# Altium PCB PCB1.PcbDoc (part 35 of 35)
Units mm, origin at the board's own origin, x right, y up, seen from the top; angles counter-clockwise.
Board outline 94 x 82 mm, 2 copper layers (Top Layer, Bottom Layer); 46 components, 50 nets, 192 pads, 615 vias.
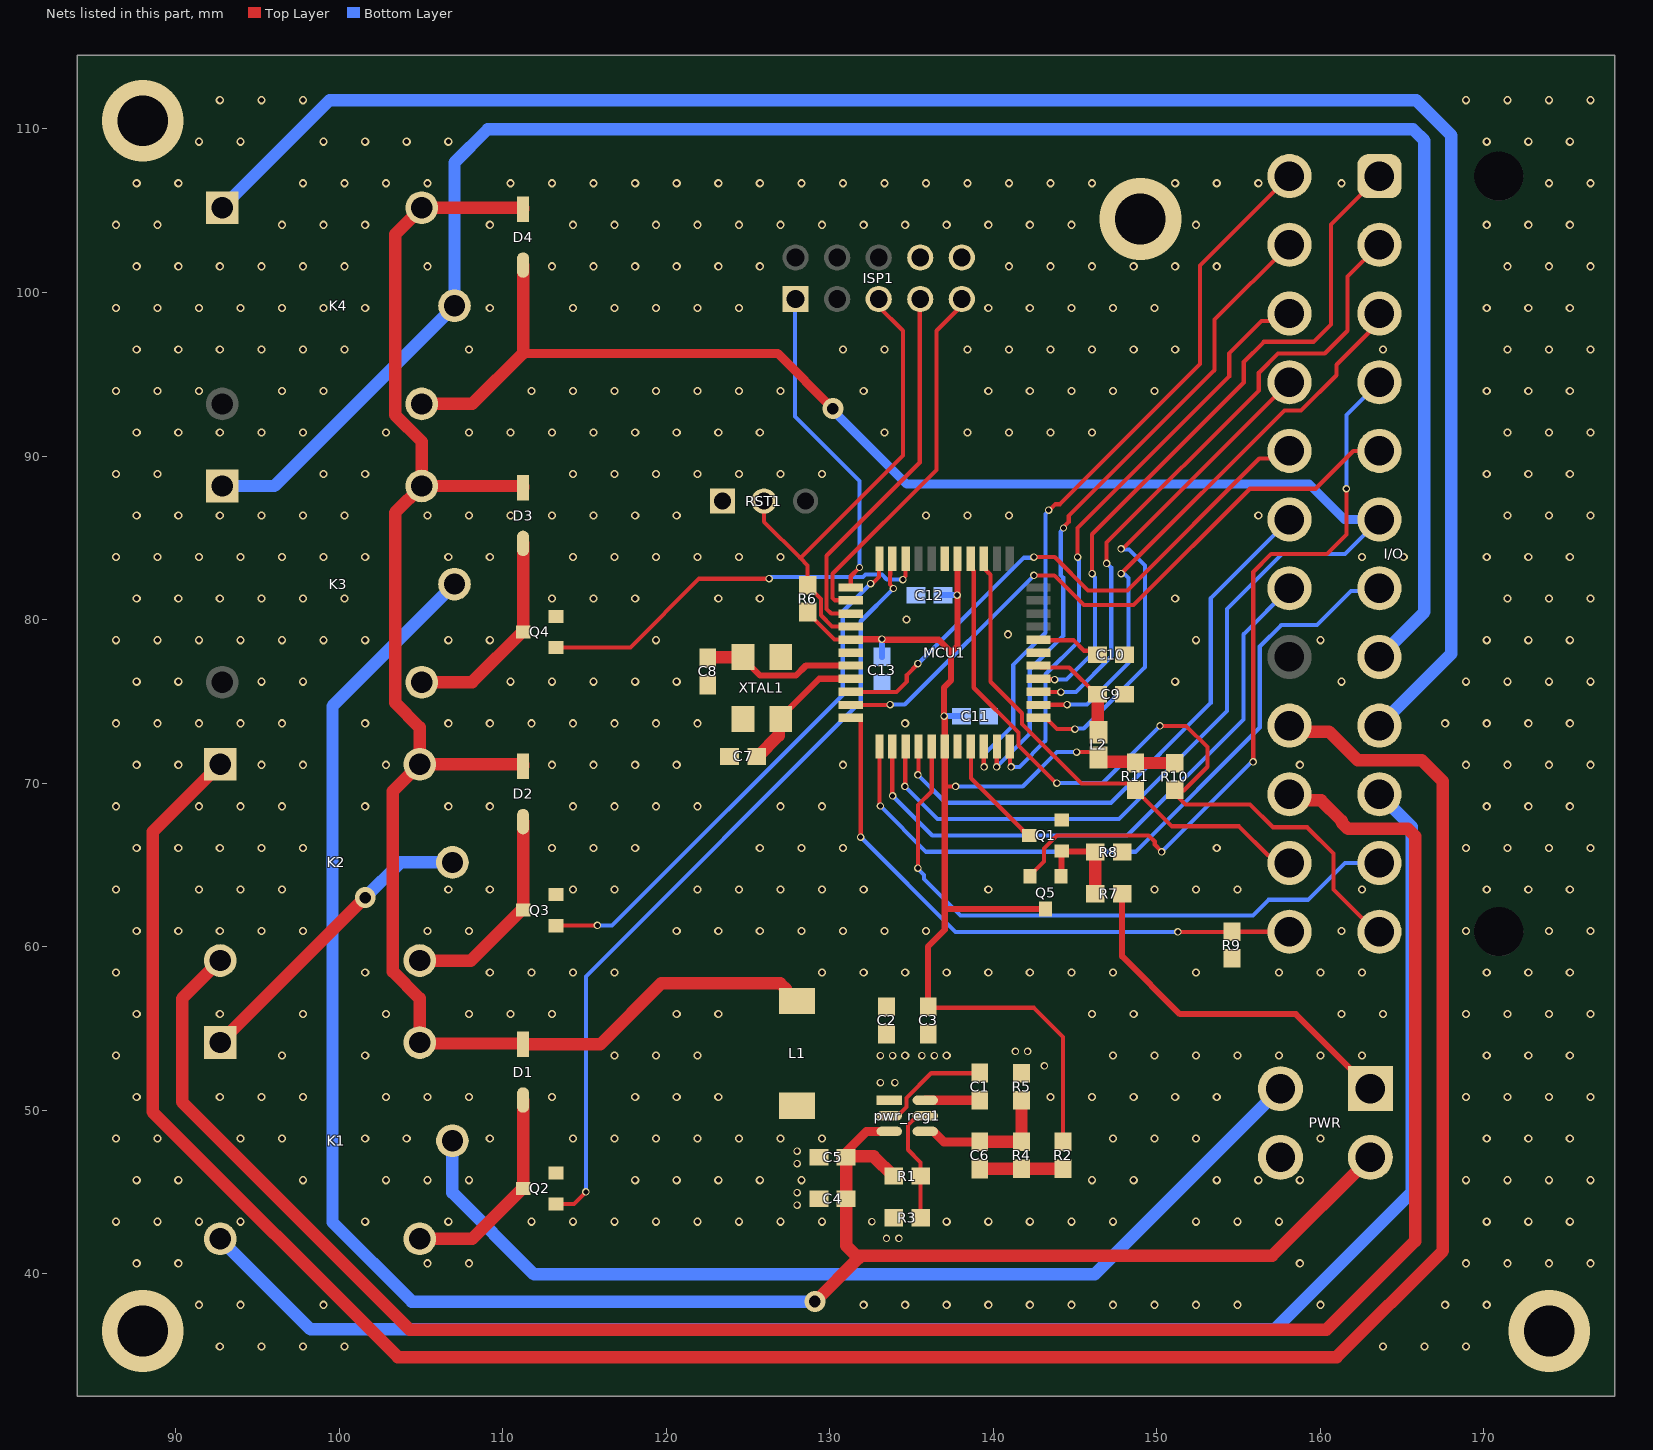
[diagram p35: the nets of this part, all layers, seen from the top]

## Part data
C1: library part CMP-13271-000587-1, "Cap Ceramic 0.1uF 25V SMD 0603", Case/Package=0603, Dielectric=X7R, Max Operating Temperature=125°C, Min Operating Temperature=-55°C, Package Quantity=10000, Tolerance=10%, Voltage=50V, Capacitance=0.1uF, Depth=0.8mm, Height=0.8mm, Lead Free="Lead Free", Length=1.6mm, Material=Ceramic, Mount="Surface Mount", Packaging="Tape and Reel", Radiation Hardening=No, Thickness=0.035inch, Voltage Rating=50V, Voltage Rating (DC)=50V, Width=0.031inch
C2 C3: library part CMP-13271-000587-1, "Cap Ceramic 22uF 25V X7R LOW ESR SMD 0603", Case/Package=0603, Dielectric=X7R, Max Operating Temperature=125°C, Min Operating Temperature=-55°C, Package Quantity=10000, Tolerance=10%, Voltage=50V, Capacitance=22uF, Depth=0.8mm, Height=0.8mm, Lead Free="Lead Free", Length=1.6mm, Material=Ceramic, Mount="Surface Mount", Packaging="Tape and Reel", Radiation Hardening=No, Thickness=0.035inch, Voltage Rating=50V, Voltage Rating (DC)=50V, Width=0.031inch
C4: library part CMP-13271-000587-1, "Cap Ceramic 10uF 25V SMD 0603", Case/Package=0603, Dielectric=X7R, Max Operating Temperature=125°C, Min Operating Temperature=-55°C, Package Quantity=10000, Tolerance=10%, Voltage=50V, Capacitance=10uF, Depth=0.8mm, Height=0.8mm, Lead Free="Lead Free", Length=1.6mm, Material=Ceramic, Mount="Surface Mount", Packaging="Tape and Reel", Radiation Hardening=No, Thickness=0.035inch, Voltage Rating=50V, Voltage Rating (DC)=50V, Width=0.031inch
C5: library part CMP-13271-000587-1, "Cap Ceramic 1uF 25V SMD 0603", Case/Package=0603, Dielectric=X7R, Max Operating Temperature=125°C, Min Operating Temperature=-55°C, Package Quantity=10000, Tolerance=10%, Voltage=50V, Capacitance=1uF, Depth=0.8mm, Height=0.8mm, Lead Free="Lead Free", Length=1.6mm, Material=Ceramic, Mount="Surface Mount", Packaging="Tape and Reel", Radiation Hardening=No, Thickness=0.035inch, Voltage Rating=50V, Voltage Rating (DC)=50V, Width=0.031inch
C6: library part CMP-13271-000587-1, "Cap Ceramic 75pF 25V SMD 0603", Case/Package=0603, Dielectric=X7R, Max Operating Temperature=125°C, Min Operating Temperature=-55°C, Package Quantity=10000, Tolerance=10%, Voltage=50V, Capacitance=75pF, Depth=0.8mm, Height=0.8mm, Lead Free="Lead Free", Length=1.6mm, Material=Ceramic, Mount="Surface Mount", Packaging="Tape and Reel", Radiation Hardening=No, Thickness=0.035inch, Voltage Rating=50V, Voltage Rating (DC)=50V, Width=0.031inch
C7 C8: library part CMP-13271-000587-1, "Cap Ceramic 22pF 25V SMD 0603", Case/Package=0603, Dielectric=X7R, Max Operating Temperature=125°C, Min Operating Temperature=-55°C, Package Quantity=10000, Tolerance=10%, Voltage=50V, Capacitance=22pF, Depth=0.8mm, Height=0.8mm, Lead Free="Lead Free", Length=1.6mm, Material=Ceramic, Mount="Surface Mount", Packaging="Tape and Reel", Radiation Hardening=No, Thickness=0.035inch, Voltage Rating=50V, Voltage Rating (DC)=50V, Width=0.031inch
C9 C10 C11 C12 C13: library part CMP-13271-000587-1, "Cap Ceramic 100nF 50V X7R ±10% Pad SMD 0603 +125°C T/R", Case/Package=0603, Dielectric=X7R, Max Operating Temperature=125°C, Min Operating Temperature=-55°C, Package Quantity=10000, Tolerance=10%, Voltage=50V, Capacitance=100nF, Depth=0.8mm, Height=0.8mm, Lead Free="Lead Free", Length=1.6mm, Material=Ceramic, Mount="Surface Mount", Packaging="Tape and Reel", Radiation Hardening=No, Thickness=0.035inch, Voltage Rating=50V, Voltage Rating (DC)=50V, Width=0.031inch
D1 D2 D3 D4: library part CMP-0303-00003-3, "DIODE SCHOTTKY 40V 1A SOD123", Average Rectified Current=1A, Capacitance=110pF, Case/Package=SOD-123-2, Forward Voltage=450mV, Max Forward Surge Current (Ifsm)=25A, Max Operating Temperature=125°C, Max Power Dissipation=450mW, Max Repetitive Reverse Voltage (Vrrm)=40V, Min Operating Temperature=-65°C, Package Quantity=3000, Peak Reverse Current=50uA, Contact Plating=Tin, Current Rating=1A, Element Configuration=Single, Forward Current=1A, Height=1.25mm, Lead Free="Lead Free", Length=2.85mm, Max Reverse Voltage (DC)=40V, Number of Pins=2, Output Current=1A, Packaging="Tape and Reel", Peak Non-Repetitive Surge Current=25A, Polarity=Standard, Radiation Hardening=No, REACH SVHC="No SVHC", Termination=SMD/SMT, Voltage Rating (DC)=40V, Weight=0.000353oz, Width=1.7mm
I/O: library part CMP-1502-00539-2, Color=White, Contact Resistance=10mΩ, Current Rating=6A, Insulation Resistance=1GΩ, Max Operating Temperature=105°C, Min Operating Temperature=-40°C, Operating Supply Voltage=600V, Connector Type="Male Pin, Socket", Contact Material=Copper, Contact Plating=Tin, Fastening Type=Ramp, Gender=Male, Height=12.8mm, Lead Pitch=4.2mm, Length=51.6mm, Mount="Through Hole", NexarPartId=23024662, Number of Contacts=24, Number of Pins=24, Number of Positions=24, Number of Rows=2, Pitch=4.2mm, REACH SVHC=Unknown, RoHS=Compliant, Row Spacing=4.191mm, Termination=Solder, Width=51.7mm
ISP1: library part CMP-2000-05031-1, "Male Header, Pitch 2.54 mm, 2 x 5 Position, Height 9.3 mm, Tail Length 2.79 mm, -55 to 105 degC, RoHS, Bulk", Current Rating=1A, Manufacturer=3M, Brand=3MElectronicSolutionsDivision, Contact Gender=Pin(Male), Contact Material=Brass, Contact Plating=Gold, Datasheet URL=http://datasheet.octopart.com/30310-6002HB-3M-datasheet-11537585.pdf, Datasheet Version=Apr-12, Factory Pack Quantity=1000, Housing Material=Polyester, Manufacturer URL=http://www.3m.com/, Mating Post Length=5.99mm, Mounting Angle=Straight, Mounting Style=StraightPin, Number of Positions=10Position, Number of Rows=2Row, Packaging=Tray, Pitch=2.54mm, Product=Headers, Product Category=Headers&WireHousings, RoHS=Details, Row Spacing=2.54mm, Series=303, Termination Post Length=2.79mm, Termination Style=ThroughHole, Type=Shrouded
K1 K2 K3 K4: library part CMP-03395-000112-1, "Relpol / RM51-3011-85-1005 / RELAY 10A 5V", Ambient Temperature Range High=+70°C, Ambient Temperature Range Low=-30°C, Coil Power=360mW, Coil Resistance=70Ω, Coil Voltage=5V, Current Rating=10A, Manufacturer=TE, Manufacturer Part Number=1-1721150-0, Automotive=No, Category=Relay, Coil Type=Non-Latching, ComponentLink2Description=Datasheet, ComponentLink2URL=https://www.te.com/usa-en/product-1-1721150-0.html?te_bu=Cor&te_type=other&te_campaign=oct_glo_cor-oct-global-oth-prtnr-fy19-oct-octo-buy-bom_sma-298_2&elqCampaignId=35216, Device Class L1=Electromechanical, Device Class L2=Relays, Device Class L3="Power Relays", Digikey Description="RELAY GEN PURPOSE SPDT 10A 5V", Height=16.3mm, Lead Free=Yes, Number of Contacts=1, Octopart=https://octopart.com/1-1721150-0-te+connectivity-41294869, Package=1-1721150-0, RoHS=TRUE, Standoff Height=0.2mm, Switching Current=10A, Throw Configuration=SPDT
L1: library part CMP-0227-00155-2, "15uF, 2.7A  HPI0630-150", Ambient Temperature Range High=85°C, Ambient Temperature Range Low=-40°C, Current Rating=2.7A, DC Resistance (DCR)=110mΩ, Inductance=15µH, Max Operating Temperature=125°C, Self Resonant Frequency=9.5MHz, Tolerance=20%, Depth=7.3mm, Height=4.5mm, Length=7.3mm, Max DC Current=2.7A, Min Operating Temperature=-40°C, NexarPartId=31136509, Number of Pins=2, Packaging="Tape & Reel", RoHS=Compliant, Shielding=Shielded, Width=7.3mm
L2: library part CMP-14484-000247-1, "SMD Inductors 10uH ±10% 0.38A 0.468Ω 0603", Case Code (Imperial)=0603, Case Code (Metric)=1608, Current Rating=380mA, DC Resistance (DCR)=468mR, Inductance Tolerance=10%, Max Operating Temperature=105°C, Min Operating Temperature=-40°C, Package Quantity=3000, Resistor Type=Wirewound, Saturation Current=115mA, Self Resonant Frequency=32MHz, Test Frequency=2.52MHz, Case/Package=0603, Core Material=Ferrite, DC Current=380mA, Depth=1mm, Halogen Free="Halogen Free", Height=0.8mm, Height - Seated (Max)=0.039inch, Inductance=10uH, Lead Free="Lead Free", Length=0.063inch, Max DC Current=380mA, Military Standard=Not, Mount="Surface Mount", Packaging="Tape and Reel", Radiation Hardening=No, RoHS Compliant=Yes, Series=CB, Shielding=Unshielded, Termination=SMD/SMT, Tolerance=10%, Width=0.031inch
MCU1: "AVR AVRÂ® ATmega Microcontroller IC 8-Bit 16MHz 32KB (16K x 16) FLASH 44-TQFP (10x10)", Package="TQFP-44 Microchip", Check_prices=https://www.snapeda.com/parts/ATMEGA32A-AU/Microchip/view-part/?ref=eda, MF=Microchip, MP=ATMEGA32A-AU, SnapEDA_Link=https://www.snapeda.com/parts/ATMEGA32A-AU/Microchip/view-part/?ref=snap
PWR: library part CMP-03369-000114-1, "CONN HEADER R/A 4POS 4.2MM", Contact Current Rating=9A, Flammability Rating="UL94 V-0", Housing Color=Natural, Max Operating Temperature=221°C, Max Voltage Rating (AC)=600V, Min Operating Temperature=-40°C, Number of Power Positions=4, Package Quantity=400, Approvals=CSA, Circuit Application=Power, Connector System=Wire-to-Board, Connector Type=Pin, Contact Material=Brass, Contact Plating=Tin, Contact Retention="No (Without)", Contact Type="Male Pin", Current Rating=9A, ELV=Compliant, Fastening Type=Ramp, Height=0.386inch, Housing Material=Nylon, Insulation Diameter=0.122inch, Lead Free="Lead Free", Length=9.6mm, Mating Alignment="Yes (With)", Mating Retention="Yes (With)", Mount="Through Hole", Number of Circuits=4, Number of Contacts=4, Number of Ports=1, Number of Positions=4, Number of Rows=2, Number of Terminals/Pins=4, Orientation="Right Angle", Packaging=Tray, PCB Mount Alignment="No (Without)", PCB Mount Retention=Without, PCB Mounting Orientation="Right Angle", PCB Thickness=0.063mm, Pitch=4.2mm, Plating Thickness=78.73um, Radiation Hardening=No, RoHS Compliant=Yes, Row Spacing=4.2inch, Sealable="No (Without)", Selectively Loaded="No (Without)", Series=VAL-U-LOK, Termination=Solder, VDE Tested=No, Voltage Rating=600V, Width=13mm
pwr_reg1: library part CMP-04918-000439-1, "IC REG BUCK ADJ 2A TSOT23-6", Case/Package=SOT-23-6, Max Input Voltage=28V, Max Operating Temperature=125°C, Min Input Voltage=4.5V, Min Operating Temperature=-40°C, Min Output Voltage=596mV, Output Current=2A, Quiescent Current=40uA, Switching Frequency=500kHz, Lead Free="Lead Free", Max Output Voltage=28V, Mount="Surface Mount", Number of Outputs=1, Output Configuration=Positive, Output Type=Adjustable, Packaging="Tape and Reel", RoHS Compliant=Yes, Synchronous Rectifier=Yes
Q1 Q2 Q3 Q4 Q5: library part CMP-2000-04929-2, "MOSFET N-CH 60V 115MA SOT23-3", Case/Package=SOT-23, Continuous Drain Current (ID)=115mA, Drain to Source Breakdown Voltage=70V, Drain to Source Resistance=7.5R, Drain to Source Voltage (Vdss)=60V, Gate to Source Voltage (Vgs)=20V, Input Capacitance=50pF, Max Operating Temperature=150°C, Max Power Dissipation=300mW, Min Operating Temperature=-55°C, Package Quantity=3000, Power Dissipation=540mW, Threshold Voltage=2.5V, Contact Plating=Tin, Current Rating=115mA, Dual Supply Voltage=60V, Element Configuration=Single, Fall Time=5.6ns, Height=1mm, Lead Free="Lead Free", Length=2.9mm, Mount="Surface Mount", Nominal Vgs=2.5V, Number of Channels=1, Number of Elements=1, Number of Pins=3, On-State Resistance=7.5R, Packaging="Tape and Reel", Radiation Hardening=No, Rds On Max=7.5R, REACH SVHC="No SVHC", Rise Time=3ns, Termination=SMD/SMT, Turn-Off Delay Time=11ns, Turn-On Delay Time=7ns, Voltage=60V, Voltage Rating (DC)=60V, Weight=0.000282oz, Width=1.3mm
R1: library part CMP-2000-03245-2, "511kΩ, 0.1W, 0603", Case Code (Imperial)=0603, Case Code (Metric)=1608, Max Operating Temperature=155°C, Max Power Dissipation=100mW, Min Operating Temperature=-55°C, Package Quantity=10, Temperature Coefficient=100ppm/°C, Tolerance=1%, Voltage Rating=75V, Case/Package=0603, Composition="Thick Film", Contact Plating=Tin, Depth=0.85mm, Features="Automotive AEC-Q200", Height=0.45mm, Lead Free="Lead Free", Length=1.55mm, Military Standard=Not, Mount="Surface Mount", Number of Terminations=2, Packaging="Tape and Reel", Power Rating=100mW, Radiation Hardening=No, Resistance=511k, Termination=SMD/SMT, Voltage Rating (DC)=75V, Weight=7.1E-05oz, Width=0.033inch
R2: library part CMP-2000-03245-2, "49.9Ω, 0.1W, 0603", Case Code (Imperial)=0603, Case Code (Metric)=1608, Max Operating Temperature=155°C, Max Power Dissipation=100mW, Min Operating Temperature=-55°C, Package Quantity=10, Resistance=49.9, Temperature Coefficient=100ppm/°C, Tolerance=1%, Voltage Rating=75V, Case/Package=0603, Composition="Thick Film", Contact Plating=Tin, Depth=0.85mm, Features="Automotive AEC-Q200", Height=0.45mm, Lead Free="Lead Free", Length=1.55mm, Military Standard=Not, Mount="Surface Mount", Number of Terminations=2, Packaging="Tape and Reel", Power Rating=100mW, Radiation Hardening=No, Termination=SMD/SMT, Voltage Rating (DC)=75V, Weight=7.1E-05oz, Width=0.033inch
R3: library part CMP-2000-03245-2, "105kΩ, 0.1W, 0603", Case Code (Imperial)=0603, Case Code (Metric)=1608, Max Operating Temperature=155°C, Max Power Dissipation=100mW, Min Operating Temperature=-55°C, Package Quantity=10, Temperature Coefficient=100ppm/°C, Tolerance=1%, Voltage Rating=75V, Case/Package=0603, Composition="Thick Film", Contact Plating=Tin, Depth=0.85mm, Features="Automotive AEC-Q200", Height=0.45mm, Lead Free="Lead Free", Length=1.55mm, Military Standard=Not, Mount="Surface Mount", Number of Terminations=2, Packaging="Tape and Reel", Power Rating=100mW, Radiation Hardening=No, Resistance=105k, Termination=SMD/SMT, Voltage Rating (DC)=75V, Weight=7.1E-05oz, Width=0.033inch
R4: library part CMP-2000-03245-2, "100kΩ, 0.1W, 0603", Case Code (Imperial)=0603, Case Code (Metric)=1608, Max Operating Temperature=155°C, Max Power Dissipation=100mW, Min Operating Temperature=-55°C, Package Quantity=10, Temperature Coefficient=100ppm/°C, Tolerance=1%, Voltage Rating=75V, Case/Package=0603, Composition="Thick Film", Contact Plating=Tin, Depth=0.85mm, Features="Automotive AEC-Q200", Height=0.45mm, Lead Free="Lead Free", Length=1.55mm, Military Standard=Not, Mount="Surface Mount", Number of Terminations=2, Packaging="Tape and Reel", Power Rating=100mW, Radiation Hardening=No, Resistance=100k, Termination=SMD/SMT, Voltage Rating (DC)=75V, Weight=7.1E-05oz, Width=0.033inch
R5: library part CMP-2000-03245-2, "13.3kΩ, 0.1W, 0603", Case Code (Imperial)=0603, Case Code (Metric)=1608, Max Operating Temperature=155°C, Max Power Dissipation=100mW, Min Operating Temperature=-55°C, Package Quantity=10, Temperature Coefficient=100ppm/°C, Tolerance=1%, Voltage Rating=75V, Case/Package=0603, Composition="Thick Film", Contact Plating=Tin, Depth=0.85mm, Features="Automotive AEC-Q200", Height=0.45mm, Lead Free="Lead Free", Length=1.55mm, Military Standard=Not, Mount="Surface Mount", Number of Terminations=2, Packaging="Tape and Reel", Power Rating=100mW, Radiation Hardening=No, Resistance=13.3k, Termination=SMD/SMT, Voltage Rating (DC)=75V, Weight=7.1E-05oz, Width=0.033inch
R6 R9 R10: library part CMP-2000-03245-2, "10kΩ, 0.1W, 0603", Case Code (Imperial)=0603, Case Code (Metric)=1608, Max Operating Temperature=155°C, Max Power Dissipation=100mW, Min Operating Temperature=-55°C, Package Quantity=10, Temperature Coefficient=100ppm/°C, Tolerance=1%, Voltage Rating=75V, Case/Package=0603, Composition="Thick Film", Contact Plating=Tin, Depth=0.85mm, Features="Automotive AEC-Q200", Height=0.45mm, Lead Free="Lead Free", Length=1.55mm, Military Standard=Not, Mount="Surface Mount", Number of Terminations=2, Packaging="Tape and Reel", Power Rating=100mW, Radiation Hardening=No, Resistance=10k, Termination=SMD/SMT, Voltage Rating (DC)=75V, Weight=7.1E-05oz, Width=0.033inch
R7: library part CMP-2000-03245-2, "220kΩ, 0.1W, 0603", Case Code (Imperial)=0603, Case Code (Metric)=1608, Max Operating Temperature=155°C, Max Power Dissipation=100mW, Min Operating Temperature=-55°C, Package Quantity=10, Resistance=10k, Temperature Coefficient=100ppm/°C, Tolerance=1%, Voltage Rating=75V, Case/Package=0603, Composition="Thick Film", Contact Plating=Tin, Depth=0.85mm, Features="Automotive AEC-Q200", Height=0.45mm, Lead Free="Lead Free", Length=1.55mm, Military Standard=Not, Mount="Surface Mount", Number of Terminations=2, Packaging="Tape and Reel", Power Rating=100mW, Radiation Hardening=No, Termination=SMD/SMT, Voltage Rating (DC)=75V, Weight=7.1E-05oz, Width=0.033inch
R8: library part CMP-2000-03245-2, "150kΩ, 0.1W, 0603", Case Code (Imperial)=0603, Case Code (Metric)=1608, Max Operating Temperature=155°C, Max Power Dissipation=100mW, Min Operating Temperature=-55°C, Package Quantity=10, Resistance=10k, Temperature Coefficient=100ppm/°C, Tolerance=1%, Voltage Rating=75V, Case/Package=0603, Composition="Thick Film", Contact Plating=Tin, Depth=0.85mm, Features="Automotive AEC-Q200", Height=0.45mm, Lead Free="Lead Free", Length=1.55mm, Military Standard=Not, Mount="Surface Mount", Number of Terminations=2, Packaging="Tape and Reel", Power Rating=100mW, Radiation Hardening=No, Termination=SMD/SMT, Voltage Rating (DC)=75V, Weight=7.1E-05oz, Width=0.033inch
R11: library part CMP-2000-03245-2, "50kΩ, 0.1W, 0603", Case Code (Imperial)=0603, Case Code (Metric)=1608, Max Operating Temperature=155°C, Max Power Dissipation=100mW, Min Operating Temperature=-55°C, Package Quantity=10, Resistance=10k, Temperature Coefficient=100ppm/°C, Tolerance=1%, Voltage Rating=75V, Case/Package=0603, Composition="Thick Film", Contact Plating=Tin, Depth=0.85mm, Features="Automotive AEC-Q200", Height=0.45mm, Lead Free="Lead Free", Length=1.55mm, Military Standard=Not, Mount="Surface Mount", Number of Terminations=2, Packaging="Tape and Reel", Power Rating=100mW, Radiation Hardening=No, Termination=SMD/SMT, Voltage Rating (DC)=75V, Weight=7.1E-05oz, Width=0.033inch
RST1: library part CMP-1676-00001-5, "Male Header, Pitch 2.54 mm, 1 x 3 Position, Height 8.38 mm, Tail Length 3.18 mm, RoHS, Bulk", Colour=Black, Current Rating="4 A", Manufacturer=Molex, Max Operating Temperature="75 degC", Min Operating Temperature="0 degC", Package Quantity=1, Voltage Rating="250 V", ComponentLink1Description="Manufacturer URL", ComponentLink1URL=http://www.molex.com/, ComponentLink2Description=Datasheet, ComponentLink2URL=http://www.molex.com/pdm_docs/sd/022284033_sd.pdf, Contact Finish=Gold, Contact Material=Brass, Contact Plating=Gold, DatasheetVersion="Rev. G, 01/2012", Height="8.38 mm", Lead Pitch="0.1 inch", Length="7.62 mm", Mount="Through Hole", Mounting Technology="Through Hole", PackageDescription="Male Header, Pitch 2.54 mm, 1 x 3 Position, Height 8.38 mm, Tail Length 3.18 mm", PackageReference=22-28-4033, Packaging=Bulk, Pins=3, REACH SVHC=Unknown, RoHSCompliant=true, Rows=1
XTAL1: library part CMP-96504-000007-1, "LFXTAL055663REEL / CRYSTAL 8.0000MHZ 18PF SMD", RoHS Compliant=Yes

## Via types
v1: diameter 0.5, hole 0.305, Top Layer to Bottom Layer, tented both sides, 550 vias
v2: diameter 0.457, hole 0.305, Top Layer to Bottom Layer, tented both sides, 58 vias
v3: diameter 5, hole 3.1, Top Layer to Bottom Layer, 4 vias
v4: diameter 1.27, hole 0.711, Top Layer to Bottom Layer, tented both sides, 3 vias

## Nets (pads, with @x,y where several pads share a name; then routed paths per layer and width w, separated by ;. In a path a pad name is that pad's centre, name@x,y a point inside that pad or via, vN(x,y) a via of type N, cw(c..) or ccw(c..) an arc to the next point about the centre after c; other vN are vias at no path point)
4V865: Q1.1 Q5.1 R7.1 R8.2 | length 6.3
  Top Layer w0.381: Q5.1@144.15,64.3 144.175,64.325 Q1.1@144.175,65.818 ; Q1.1@144.162,65.819 144.129,65.852 144.163,65.818 Q1.1@144.175,65.818 ; Q1.1@144.2,65.85 144.175,65.825 Q1.1@144.175,65.818 ; R8.2@146.251,65.786 146.219,65.818 Q1.1@144.175,65.818
  Top Layer w0.762: R7.1@146.251,63.246 R8.2@146.251,65.786
BLINK1: I/O.8 K3.1 K4.3 | length 120.7
  Bottom Layer w0.762: K3.1@92.86,88.169 96.042,88.169 K4.3@107.06,99.187 107.06,107.949 109.093,109.982 165.67,109.982 166.37,109.282 166.37,80.47 I/O.8@163.615,77.715
BLINK2: I/O.9 K4.1 | length 116.7
  Bottom Layer w0.762: K4.1@92.86,105.187 99.433,111.76 165.862,111.76 168.021,109.601 168.021,77.921 I/O.9@163.615,73.515
BLINK_SWITCH_(GND): D4.2 I/O.6 K4.5 MCU1.14 | length 113.1
  Top Layer w0.254: v2(134.6,69.8) 134.623,69.823 134.623,72.215 MCU1.14@134.645,72.238 MCU1.14@134.633,72.25
  Top Layer w0.554: 111.252,96.282 126.818,96.282 v4(130.2,92.9)
  Top Layer w0.762: K4.5@105.06,93.187 108.139,93.187 111.234,96.282 111.252,96.282 D4.2@111.252,101.678
  Bottom Layer w0.254: v2(134.6,69.8) 136.6,67.8 147.7,67.8 154.3,74.4 154.3,80.64 157.671,84.01 161.511,84.01 I/O.6@163.615,86.115
  Bottom Layer w0.554: v4(130.2,92.9) 130.2,92.8 134.721,88.279 159.321,88.279 161.485,86.115 I/O.6@163.615,86.115
BLINKRES_SIG: MCU1.42 Q4.1 | length 24.5
  Top Layer w0.254: Q4.1@113.268,78.298 117.817,78.298 122.019,82.5 v2(126.3,82.5) ; v2(134.481,82.439) 134.481,82.494 134.645,82.659 MCU1.42@134.645,83.718
  Bottom Layer w0.254: v2(126.3,82.5) 126.4,82.6 132.031,82.6 132.19,82.759 133.193,82.759 133.493,82.459 134.461,82.459 v2(134.481,82.439)
BULB_OUT: I/O.21 K2.1 | length 150.3
  Top Layer w0.762: K2.1@92.733,71.151 88.6,67.018 88.6,49.9 103.6,34.9 161,34.9 167.5,41.4 167.5,70.1 166.2,71.4 162.278,71.4 160.534,73.144 158.486,73.144 I/O.21@158.115,73.515
BUZZER: I/O.11 MCU1.16 | length 38.7
  Top Layer w0.254: v2(135.4,64.8) 135.4,68.654 136.246,69.5 MCU1.16@136.246,72.238
  Bottom Layer w0.254: v2(135.4,64.8) 135.4,64.745 135.771,64.374 135.771,64.129 137.997,61.903 155.883,61.903 156.845,62.865 159.258,62.865 161.508,65.115 I/O.11@163.615,65.115
DISP_KEY: I/O.19 MCU1.13 | length 37.6
  Top Layer w0.254: MCU1.13@133.833,72.238 133.833,69.24 v2(133.858,69.215)
  Bottom Layer w0.254: v2(133.858,69.215) 136.273,66.8 148.2,66.8 155.3,73.9 155.3,79.1 I/O.19@158.115,81.915
FOTO: I/O.23 MCU1.36 R11.2 | length 31
  Top Layer w0.254: MCU1.36@139.421,83.718 139.548,83.591 139.548,83.027 139.7,82.875 139.7,82.866 139.827,82.739 139.827,76.2 141.757,74.27 141.757,73.62 145.401,69.977 148.323,69.977 R11.2@148.7,69.6 148.7,69.564 149.104,69.159 149.141,69.159 150.941,67.359 155.041,67.359 156.817,65.583 157.647,65.583 I/O.23@158.115,65.115
GND: C2.2 C3.2 C4.2 C5.2 C7.1 C8.1 C9.2 C10.2 C11.2 C12.2 C13.2 ISP1.8 ISP1.10 MCU1.6 MCU1.18 MCU1.28 MCU1.39 PWR.4 pwr_reg1.1 Q1.2 Q2.2 Q3.2 Q4.2 R3.2 R5.2 R8.1 R9.2 RST1.1 XTAL1.2 XTAL1.4 | length 0.1
  Top Layer w0.102: C5.2@129.275,47.117 C5.2@129.348,47.117
  other v1: 92.71,35.56 95.25,35.56 97.79,35.56 100.33,35.56 163.83,35.56 166.37,35.56 168.91,35.56 91.44,38.1 93.98,38.1 99.06,38.1 132.08,38.1 134.62,38.1 137.16,38.1 139.7,38.1 142.24,38.1 144.78,38.1 147.32,38.1 149.86,38.1 152.4,38.1 154.94,38.1 160.02,38.1 167.64,38.1 170.18,38.1 87.63,40.64 90.17,40.64 105.41,40.64 107.95,40.64 158.75,40.64 168.91,40.64 171.45,40.64 173.99,40.64 176.53,40.64 86.36,43.18 88.9,43.18 91.44,43.18 93.98,43.18 101.6,43.18 106.68,43.18 111.76,43.18 114.3,43.18 116.84,43.18 119.38,43.18 121.92,43.18 124.46,43.18 127,43.18 129.54,43.18 137.16,43.18 139.7,43.18 142.24,43.18 144.78,43.18 147.32,43.18 152.4,43.18 154.94,43.18 157.48,43.18 170.18,43.18 172.72,43.18 175.26,43.18 87.63,45.72 90.17,45.72 97.79,45.72 102.87,45.72 105.41,45.72 107.95,45.72 118.11,45.72 120.65,45.72 123.19,45.72 125.73,45.72 128.27,45.72 146.05,45.72 148.59,45.72 153.67,45.72 156.21,45.72 158.75,45.72 168.91,45.72 171.45,45.72 173.99,45.72 176.53,45.72 86.36,48.26 88.9,48.26 93.98,48.26 96.52,48.26 101.6,48.26 104.14,48.26 109.22,48.26 114.3,48.26 116.84,48.26 119.38,48.26 121.92,48.26 124.46,48.26 127,48.26 129.54,48.26 147.32,48.26 149.86,48.26 152.4,48.26 160.02,48.26 170.18,48.26 172.72,48.26 175.26,48.26 87.63,50.8 92.71,50.8 95.25,50.8 97.79,50.8 102.87,50.8 105.41,50.8 107.95,50.8 113.03,50.8 118.11,50.8 120.65,50.8 123.19,50.8 143.51,50.8 146.05,50.8 148.59,50.8 151.13,50.8 153.67,50.8 168.91,50.8 171.45,50.8 173.99,50.8 176.53,50.8 86.36,53.34 96.52,53.34 101.6,53.34 116.84,53.34 119.38,53.34 121.92,53.34 134.62,53.34 137.16,53.34 147.32,53.34 149.86,53.34 152.4,53.34 154.94,53.34 157.48,53.34 160.02,53.34 162.56,53.34 170.18,53.34 172.72,53.34 175.26,53.34 87.63,55.88 92.71,55.88 97.79,55.88 102.87,55.88 107.95,55.88 110.49,55.88 113.03,55.88 120.65,55.88 123.19,55.88 146.05,55.88 148.59,55.88 161.29,55.88 163.83,55.88 168.91,55.88 171.45,55.88 173.99,55.88 176.53,55.88 86.36,58.42 101.6,58.42 109.22,58.42 111.76,58.42 114.3,58.42 116.84,58.42 129.54,58.42 132.08,58.42 134.62,58.42 137.16,58.42 139.7,58.42 142.24,58.42 144.78,58.42 147.32,58.42 152.4,58.42 157.48,58.42 160.02,58.42 162.56,58.42 170.18,58.42 172.72,58.42 175.26,58.42 87.63,60.96 90.17,60.96 92.71,60.96 95.25,60.96 97.79,60.96 105.41,60.96 107.95,60.96 120.65,60.96 123.19,60.96 125.73,60.96 128.27,60.96 130.81,60.96 133.35,60.96 135.89,60.96 161.29,60.96 168.91,60.96 173.99,60.96 176.53,60.96 86.36,63.5 91.44,63.5 93.98,63.5 96.52,63.5 106.68,63.5 109.22,63.5 114.3,63.5 116.84,63.5 121.92,63.5 124.46,63.5 127,63.5 129.54,63.5 132.08,63.5 139.7,63.5 149.86,63.5 152.4,63.5 154.94,63.5 162.56,63.5 170.18,63.5 172.72,63.5 175.26,63.5 87.63,66.04 90.17,66.04 92.71,66.04 95.25,66.04 97.79,66.04 113.03,66.04 115.57,66.04 118.11,66.04 125.73,66.04 128.27,66.04 130.81,66.04 153.67,66.04 168.91,66.04 171.45,66.04 173.99,66.04 176.53,66.04 86.36,68.58 91.44,68.58 93.98,68.58 96.52,68.58 101.6,68.58 106.68,68.58 109.22,68.58 114.3,68.58 116.84,68.58 119.38,68.58 121.92,68.58 127,68.58 129.54,68.58 170.18,68.58 172.72,68.58 175.26,68.58 87.63,71.12 90.17,71.12 95.25,71.12 97.79,71.12 102.87,71.12 113.03,71.12 115.57,71.12 118.11,71.12 120.65,71.12 130.81,71.12 158.75,71.12 168.91,71.12 171.45,71.12 173.99,71.12 176.53,71.12 86.36,73.66 88.9,73.66 91.44,73.66 93.98,73.66 96.52,73.66 101.6,73.66 106.68,73.66 109.22,73.66 111.76,73.66 114.3,73.66 116.84,73.66 119.38,73.66 121.92,73.66 134.62,73.66 167.64,73.66 170.18,73.66 172.72,73.66 175.26,73.66 87.63,76.2 90.17,76.2 95.25,76.2 97.79,76.2 110.49,76.2 113.03,76.2 115.57,76.2 118.11,76.2 120.65,76.2 151.13,76.2 161.29,76.2 168.91,76.2 171.45,76.2 173.99,76.2 176.53,76.2 86.36,78.74 88.9,78.74 91.44,78.74 93.98,78.74 96.52,78.74 99.06,78.74 101.6,78.74 106.68,78.74 109.22,78.74 119.38,78.74 152.4,78.74 160.02,78.74 170.18,78.74 172.72,78.74 175.26,78.74 140.9,79.1 134.7,80 87.63,81.28 90.17,81.28 92.71,81.28 95.25,81.28 97.79,81.28 100.33,81.28 113.03,81.28 115.57,81.28 118.11,81.28 123.19,81.28 125.73,81.28 151.13,81.28 171.45,81.28 173.99,81.28 176.53,81.28 86.36,83.82 88.9,83.82 91.44,83.82 93.98,83.82 96.52,83.82 99.06,83.82 101.6,83.82 106.68,83.82 109.22,83.82 114.3,83.82 116.84,83.82 119.38,83.82 121.92,83.82 124.46,83.82 127,83.82 162.56,83.82 165.1,83.82 170.18,83.82 172.72,83.82 175.26,83.82 87.63,86.36 90.17,86.36 92.71,86.36 95.25,86.36 97.79,86.36 100.33,86.36 105.41,86.36 107.95,86.36 110.49,86.36 113.03,86.36 115.57,86.36 118.11,86.36 120.65,86.36 135.89,86.36 138.43,86.36 140.97,86.36 156.21,86.36 171.45,86.36 173.99,86.36 176.53,86.36 86.36,88.9 88.9,88.9 99.06,88.9 101.6,88.9 114.3,88.9 116.84,88.9 119.38,88.9 121.92,88.9 124.46,88.9 127,88.9 129.54,88.9 170.18,88.9 172.72,88.9 175.26,88.9 87.63,91.44 90.17,91.44 92.71,91.44 95.25,91.44 97.79,91.44 102.87,91.44 107.95,91.44 110.49,91.44 113.03,91.44 115.57,91.44 118.11,91.44 120.65,91.44 123.19,91.44 125.73,91.44 133.35,91.44 138.43,91.44 140.97,91.44 143.51,91.44 146.05,91.44 171.45,91.44 173.99,91.44 176.53,91.44 86.36,93.98 88.9,93.98 91.44,93.98 96.52,93.98 99.06,93.98 111.76,93.98 114.3,93.98 116.84,93.98 119.38,93.98 121.92,93.98 124.46,93.98 127,93.98 132.08,93.98 139.7,93.98 142.24,93.98 144.78,93.98 147.32,93.98 149.86,93.98 170.18,93.98 172.72,93.98 175.26,93.98 87.63,96.52 90.17,96.52 92.71,96.52 95.25,96.52 97.79,96.52 100.33,96.52 107.95,96.52 130.81,96.52 133.35,96.52 138.43,96.52 140.97,96.52 143.51,96.52 146.05,96.52 148.59,96.52 151.13,96.52 163.83,96.52 171.45,96.52 173.99,96.52 176.53,96.52 86.36,99.06 88.9,99.06 91.44,99.06 93.98,99.06 96.52,99.06 99.06,99.06 101.6,99.06 109.22,99.06 114.3,99.06 116.84,99.06 119.38,99.06 121.92,99.06 124.46,99.06 139.7,99.06 142.24,99.06 144.78,99.06 147.32,99.06 149.86,99.06 170.18,99.06 172.72,99.06 175.26,99.06 87.63,101.6 90.17,101.6 92.71,101.6 95.25,101.6 97.79,101.6 100.33,101.6 105.41,101.6 113.03,101.6 115.57,101.6 118.11,101.6 120.65,101.6 123.19,101.6 125.73,101.6 140.97,101.6 143.51,101.6 146.05,101.6 148.59,101.6 151.13,101.6 153.67,101.6 171.45,101.6 173.99,101.6 176.53,101.6 86.36,104.14 88.9,104.14 96.52,104.14 99.06,104.14 101.6,104.14 109.22,104.14 114.3,104.14 116.84,104.14 119.38,104.14 121.92,104.14 124.46,104.14 127,104.14 129.54,104.14 132.08,104.14 134.62,104.14 137.16,104.14 139.7,104.14 142.24,104.14 144.78,104.14 152.4,104.14 170.18,104.14 172.72,104.14 175.26,104.14 87.63,106.68 90.17,106.68 97.79,106.68 100.33,106.68 102.87,106.68 105.41,106.68 110.49,106.68 113.03,106.68 115.57,106.68 118.11,106.68 120.65,106.68 123.19,106.68 125.73,106.68 128.27,106.68 130.81,106.68 133.35,106.68 135.89,106.68 138.43,106.68 140.97,106.68 143.51,106.68 146.05,106.68 151.13,106.68 153.67,106.68 156.21,106.68 161.29,106.68 173.99,106.68 176.53,106.68 91.44,109.22 93.98,109.22 99.06,109.22 101.6,109.22 104.14,109.22 106.68,109.22 170.18,109.22 172.72,109.22 175.26,109.22 92.71,111.76 95.25,111.76 97.79,111.76 168.91,111.76 171.45,111.76 173.99,111.76 176.53,111.76
  other v2: 133.477,42.164 134.239,42.164 132.588,43.18 128.016,44.196 128.016,44.958 128.016,46.736 128.016,47.498 133.096,51.689 133.985,51.689 143.129,52.705 133.096,53.34 133.858,53.34 135.636,53.34 136.398,53.34 141.351,53.594 142.113,53.594
  other v3: 88,36.5 174,36.5 149,104.5 88,110.5
IDLE: MCU1.19 Q1.3 | length 6.9
  Top Layer w0.254: MCU1.19@138.633,72.238 138.633,70.298 141.806,67.125 141.806,67.075 142.079,66.802 Q1.3@142.129,66.802
LCD_5V: I/O.4 Q5.2 | length 46.4
  Top Layer w0.254: Q5.2@142.25,64.3 142.25,64.35 143.11,65.21 143.11,66.006 143.905,66.8 149.5,66.8 149.881,66.419 149.881,66.243 150.3,65.823 v2(150.3,65.8) ; v2(155.9,71.3) 155.9,82.9 157,84 160.4,84 161.6,85.2 v2(161.6,88)
  Bottom Layer w0.254: v2(150.3,65.8) 155.761,71.261 155.861,71.261 v2(155.9,71.3) ; v2(161.6,88) 161.6,92.5 I/O.4@163.615,94.515
LCD_D4: I/O.16 MCU1.23 | length 31
  Top Layer w0.254: MCU1.23@142.773,73.99 143.256,73.99 143.383,73.863 143.383,73.817 143.9,73.3 v2(145,73.3) ; v2(147.828,84.328) 147.867,84.367 147.967,84.367 I/O.16@158.115,94.515
  Bottom Layer w0.254: v2(145,73.3) 145.039,73.339 145.54,73.339 149.29,77.089 149.29,83.312 148.314,84.288 147.923,84.288 147.883,84.328 v2(147.828,84.328)
LCD_D5: I/O.3 MCU1.24 | length 35.4
  Top Layer w0.254: MCU1.24@142.773,74.778 142.786,74.79 144.513,74.79 v2(144.526,74.803) ; v2(147.828,82.804) 157.808,92.784 158.832,92.784 160.989,94.942 160.989,95.584 163.615,98.21 I/O.3@163.615,98.715
  Bottom Layer w0.254: v2(144.526,74.803) 145.734,74.803 148.274,77.343 148.274,82.551 148.06,82.765 147.867,82.765 v2(147.828,82.804)
LCD_D6: I/O.2 MCU1.25 | length 39.2
  Top Layer w0.254: MCU1.25@142.773,75.59 142.786,75.578 144.132,75.578 v2(144.145,75.565) ; v2(146.939,83.439) 146.939,84.709 156.242,94.012 156.242,95.091 157.418,96.266 160.274,96.266 161.671,97.663 161.671,100.971 I/O.2@163.615,102.915
  Bottom Layer w0.254: v2@144.147,75.567 145.057,75.567 147.216,77.726 147.216,83.189 146.965,83.439 v2(146.939,83.439)
LCD_D7: I/O.1 MCU1.26 | length 42.4
  Top Layer w0.254: MCU1.26@142.773,76.378 142.799,76.352 143.739,76.352 v2(143.764,76.327) ; v2(146.05,82.804) 146.05,85.217 155.321,94.488 155.321,95.758 156.547,96.984 159.595,96.984 160.655,98.044 160.655,104.155 I/O.1@163.615,107.115
  Bottom Layer w0.254: v2@143.773,76.336 144.493,76.336 146.232,78.075 146.232,82.567 146.05,82.749 v2(146.05,82.804)
LCD_E: I/O.15 MCU1.22 | length 37.1
  Top Layer w0.254: MCU1.22@141.021,72.238 141.021,71.196 141.097,71.12 v2(141.097,70.993) ; v2(145.161,83.82) 145.161,85.598 154.432,94.869 154.432,96.266 156.413,98.247 157.647,98.247 I/O.15@158.115,98.715
  Bottom Layer w0.254: v2(141.097,70.993) 141.605,70.993 143.205,72.593 143.205,76.657 145.237,78.689 145.237,83.6 145.2,83.637 145.2,83.781 v2(145.161,83.82)
LCD_RS: I/O.13 MCU1.20 | length 45.3
  Top Layer w0.254: MCU1.20@139.421,72.238 139.421,71.018 v2(139.446,70.993) ; v2(143.394,86.698) 143.449,86.698 143.806,87.055 144.078,87.055 152.654,95.631 152.654,101.654 I/O.13@158.115,107.115
  Bottom Layer w0.254: v2(139.446,70.993) 139.446,71.755 141.224,73.533 141.224,77.216 143.2,79.192 143.2,86.449 143.394,86.643 v2(143.394,86.698)
LCD_RW: I/O.14 MCU1.21 | length 40.7
  Top Layer w0.254: v2(140.208,70.993) 140.221,71.006 140.221,72.225 MCU1.21@140.233,72.238 ; v2(144.3,85.6) 144.3,85.655 144.617,85.972 144.617,86.324 153.543,95.25 153.543,98.343 I/O.14@158.115,102.915
  Bottom Layer w0.254: v2(140.208,70.993) 142.24,73.025 142.24,76.962 144.281,79.003 144.281,82.564 144.127,82.718 144.127,85.372 144.3,85.545 v2(144.3,85.6)
LED_OUT: I/O.22 K2.4 | length 126.6
  Top Layer w0.762: K2.4@92.733,59.151 90.4,56.818 90.4,50.5 104.319,36.581 160.381,36.581 165.8,42 165.8,66.754 165.354,67.2 161.7,67.2 161.3,67.6 161.3,67.7 160.056,68.944 158.486,68.944 I/O.22@158.115,69.315
LIGHT_MCU: K1.1 K2.3 | length 18.8
  Top Layer w0.762: K1.1@92.733,54.133 v4(101.6,63)
  Bottom Layer w0.762: v4(101.6,63) 103.751,65.151 K2.3@106.933,65.151
LIGHT_MODE: MCU1.43 Q2.1 | length 48.8
  Top Layer w0.254: Q2.1@113.268,44.262 114.362,44.262 v2(115.1,45) ; MCU1.43@133.833,83.718 133.706,83.591 133.706,82.753 133.701,82.748 133.701,82.154 133.9,81.955 v2(133.9,81.9)
  Bottom Layer w0.254: v2(115.1,45) 115.1,58.181 131.9,74.981 131.9,79.9 v2(133.9,81.9)
LIGHT_SET: MCU1.44 Q3.1 | length 32.7
  Top Layer w0.254: Q3.1@113.268,61.28 113.288,61.3 v2(115.8,61.3) ; v2(132.512,82.2) 132.551,82.239 132.661,82.239 133.023,82.601 133.023,83.696 MCU1.44@133.045,83.718
  Bottom Layer w0.254: v2(115.8,61.3) 116.7,61.3 130.8,75.4 130.8,80.488 v2(132.512,82.2)
LIGHT_SWITCH: I/O.10 K1.4 | length 103.8
  Bottom Layer w0.762: K1.4@92.733,42.133 98.266,36.6 157.2,36.6 165.6,45 165.6,67.33 I/O.10@163.615,69.315
MISO: ISP1.9 MCU1.2 | length 22.4
  Top Layer w0.254: MCU1.2@131.293,81.178 130.321,81.178 130.173,81.327 130.173,82.802 136.525,89.154 136.525,97.663 138.049,99.187 ISP1.9@138.049,99.314
MOSI: ISP1.1 MCU1.1 | length 19.2
  Top Layer w0.254: MCU1.1@131.293,81.966 131.293,82.652 v2(131.826,83.185)
  Bottom Layer w0.254: ISP1.1@127.889,99.314 127.889,92.411 131.826,88.474 v2(131.826,83.185)
NetC1_1: C1.1 pwr_reg1.6 | length 3.3
  Top Layer w0.559: pwr_reg1.6@135.847,50.607 C1.1@139.192,50.608
NetC1_2: C1.2 L1.1 pwr_reg1.2 | length 6.9
  Top Layer w0.254: pwr_reg1.2@133.647,49.657 134.155,49.657 134.703,50.205 134.703,50.754 136.211,52.262 C1.2@139.192,52.262
NetC6_1: C6.1 R2.2 R4.1 | length 5.2
  Top Layer w0.762: C6.1@139.192,46.417 139.198,46.423 141.726,46.423 R4.1@141.732,46.429 R2.2@144.272,46.429 144.198,46.355 R2.2@144.145,46.355
NetC6_2: C6.2 pwr_reg1.4 R4.2 R5.1 | length 8.7
  Top Layer w0.559: pwr_reg1.4@135.847,48.707 136.342,48.707 136.984,48.065 C6.2@139.198,48.065
  Top Layer w0.762: C6.2@139.198,48.065 141.726,48.065 R4.2@141.732,48.059 R5.1@141.732,50.62
NetC9_1: C9.1 L2.1 MCU1.27 | length 6.9
  Top Layer w0.254: MCU1.27@142.773,77.191 142.886,77.078 144.653,77.078 146.293,75.438 C9.1@146.366,75.438
  Top Layer w0.762: C9.1@146.366,75.438 146.398,75.405 146.398,72.944 L2.1@146.431,72.911
NetC10_1: C10.1 MCU1.29 | length 4
  Top Layer w0.254: MCU1.29@142.773,78.765 142.799,78.74 144.907,78.74 145.555,78.092 146.125,78.092 C10.1@146.366,77.851
NetD1_2: D1.2 K1.5 Q2.3 | length 13
  Top Layer w0.762: K1.5@104.933,42.133 108.139,42.133 111.218,45.212 Q2.3@111.268,45.212 111.26,45.22 111.26,50.616 D1.2@111.252,50.624
NetD2_2: D2.2 K2.5 Q3.3 | length 12.9
  Top Layer w0.762: K2.5@104.933,59.151 108.062,59.151 111.252,62.341 D2.2@111.252,67.642
NetD3_2: D3.2 K3.5 Q4.3 | length 12.9
  Top Layer w0.762: K3.5@105.06,76.169 108.139,76.169 111.234,79.264 111.252,79.264 D3.2@111.252,84.66
Netpwr_reg1_5: pwr_reg1.5 R1.2 R3.1 | length 7.3
  Top Layer w0.254: R3.1@135.562,43.434 R1.2@135.562,45.974 135.562,46.81 134.791,47.581 134.791,49.092 135.356,49.657 pwr_reg1.5@135.847,49.657
RPM: I/O.24 MCU1.11 R9.1 | length 36.4
  Top Layer w0.254: MCU1.11@131.293,73.99 131.773,73.99 131.9,73.863 v2(131.9,66.7) ; v2(151.3,60.9) 154.585,60.9 R9.1@154.6,60.915 ; R9.1@154.6,60.915 I/O.24@158.115,60.915
  Bottom Layer w0.254: v2(131.9,66.7) 137.7,60.9 v2(151.3,60.9)
RST: ISP1.5 MCU1.4 R6.2 RST1.2 | length 29.2
  Top Layer w0.254: RST1.2@125.984,87.249 125.984,85.979 128.207,83.757 ; MCU1.4@131.166,79.578 130.147,79.578 129.461,80.264 129.461,81.248 128.651,82.059 R6.2@128.651,82.095 128.651,83.312 128.207,83.757 ; ISP1.5@132.969,99.314 132.969,99.187 134.493,97.663 134.493,90.043 128.207,83.757
RX: I/O.17 MCU1.9 | length 34.8
  Top Layer w0.254: MCU1.9@131.293,75.59 131.305,75.578 134.078,75.578 134.719,76.219 134.719,76.619 v2(135.4,77.3) ; v2(142.494,83.82) 143.764,83.82 145.796,81.788 148.209,81.788 156.268,89.847 157.647,89.847 I/O.17@158.115,90.315
  Bottom Layer w0.254: v2(135.4,77.3) 141.884,83.784 142.458,83.784 v2(142.494,83.82)
SCK: ISP1.7 MCU1.3 | length 22.5
  Top Layer w0.254: MCU1.3@131.166,80.366 130.096,80.366 129.817,80.645 129.817,83.903 135.509,89.595 ISP1.7@135.509,99.314
SET_KEY: I/O.7 MCU1.12 | length 44.9
  Top Layer w0.254: MCU1.12@133.045,72.238 133.045,68.71 133.1,68.655 v2(133.1,68.6)
  Bottom Layer w0.254: v2(133.1,68.6) 135.9,65.8 148.7,65.8 156.3,73.4 156.3,78.348 157.617,79.666 159.803,79.666 161.884,81.747 163.447,81.747 I/O.7@163.615,81.915
STAND_KEY: I/O.18 MCU1.15 | length 36.1
  Top Layer w0.254: v2(135.4,70.5) 135.433,70.533 MCU1.15@135.433,72.238
  Bottom Layer w0.254: v2(135.4,70.5) 137.1,68.8 147.2,68.8 153.3,74.9 153.3,81.3 I/O.18@158.115,86.115
TMP: I/O.12 MCU1.37 R10.2 | length 49.2
  Top Layer w0.254: MCU1.37@138.633,83.718 138.76,83.591 138.76,83.011 138.811,82.96 138.811,75.833 141.555,73.089 141.555,72.313 v2@143.884,69.984 ; v2(150.2,73.5) 151.8,73.5 153.1,72.2 153.1,71 151.663,69.563 151.304,69.563 151.282,69.541 R10.2@151.282,69.182 ; R10.2@150.9,69.6 R10.2@150.9,69.564 ; I/O.12@163.615,60.915 163.385,60.915 160.8,63.5 160.8,65.7 159.2,67.3 157.1,67.3 155.7,68.7 151.764,68.7 R10.2@151.282,69.182 ; R10.2@150.9,69.564 R10.2@151.282,69.182 ; R10.2@150.9,69.564 R10.2@151.282,69.182
  Bottom Layer w0.254: v2(143.9,70) 146.7,70 v2(150.2,73.5)
TX: I/O.5 MCU1.10 | length 40.3
  Top Layer w0.254: MCU1.10@131.293,74.778 133.678,74.778 v2(133.7,74.8) ; v2(142.494,82.702) 143.739,82.702 145.542,80.899 148.59,80.899 155.691,88 159.7,88 162.015,90.315 I/O.5@163.615,90.315
  Bottom Layer w0.254: v2(133.7,74.8) 134.592,74.8 v2(142.494,82.702)
V_reg: C2.1 C3.1 C11.1 C12.1 C13.1 D1.1 D2.1 D3.1 D4.1 K1.2 K2.2 K3.2 K4.2 L1.2 L2.2 MCU1.5 MCU1.17 MCU1.38 Q5.3 R2.1 R6.1 R10.1 R11.1 | length 177
  Top Layer w0.254: R6.1@128.651,80.501 R6.1@128.651,80.465 128.651,80.428 130.302,78.777 MCU1.5@131.154,78.777 ; C3.1@136.017,56.326 136.082,56.261 142.494,56.261 144.272,54.483 R2.1@144.272,48.059 ; 137.033,69.85 137.083,69.8 v2(137.7,69.8) ; v2(145.1,71.9) 146.005,71.9 146.431,71.474 L2.2@146.431,71.361
  Top Layer w0.381: MCU1.5@131.293,78.765 131.327,78.8 v2(133.2,78.8) ; v2@133.2,78.765 136.671,78.765 137.427,78.01 ; C3.1@136.017,56.326 136.017,60.017 137.033,61.033 137.033,62.301 ; MCU1.38@137.82,83.718 137.82,78.403 137.427,78.01 ; Q5.3@143.2,62.3 143.199,62.301 137.033,62.301 ; 137.033,62.301 137.033,69.85 137.033,74.046 137,74.079 137,75.852 137.427,76.279 137.427,78.01
  Top Layer w0.762: D2.1@111.252,71.042 111.252,71.141 111.242,71.151 K2.2@104.933,71.151 ; D3.1@111.252,88.06 111.252,88.159 111.242,88.169 K3.2@105.06,88.169 ; D4.1@111.252,105.078 111.252,105.177 111.242,105.187 K4.2@105.06,105.187 103.425,103.552 103.425,92.51 105.06,90.875 K3.2@105.06,88.169 ; L1.2@128.016,56.667 127.77,56.667 127.351,57.086 127.351,57.38 126.979,57.752 119.7,57.752 115.972,54.024 D1.1@111.252,54.024 111.252,54.069 111.242,54.079 104.987,54.079 K1.2@104.933,54.133 104.933,56.839 103.298,58.474 103.298,69.516 K2.2@104.933,71.151 ; L2.2@146.431,71.361 146.496,71.296 148.635,71.296 R11.1@148.7,71.231 R10.1@150.9,71.231 ; K2.2@104.933,71.151 104.933,73.412 103.425,74.92 103.425,86.534 K3.2@105.06,88.169
  Bottom Layer w0.254: v2(137.7,69.8) 141.809,69.8 143.909,71.9 v2(145.1,71.9)
  Bottom Layer w0.381: C13.1@133.2,77.727 v2(133.2,78.8) ; C12.1@136.927,81.5 v2(137.8,81.5) ; v2(137,74.1) C11.1@138.073,74.1
VCC_bat: C4.1 C5.1 K3.3 PWR.2 pwr_reg1.3 R1.1 | length 124.9
  Top Layer w0.559: C5.1@130.837,47.282 132.262,48.707 pwr_reg1.3@133.647,48.707
  Top Layer w0.762: v4(129.1,38.3) 129.119,38.3 131.77,40.95 131.002,41.718 C4.1@131.002,44.577 131.002,46.992 130.939,47.055 C5.1@130.81,47.055 ; C5.1@130.81,47.182 132.687,47.182 133.895,45.974 R1.1@133.932,45.974 ; 131.62,41.1 157.051,41.1 PWR.2@163.068,47.117
  Bottom Layer w0.762: K3.3@107.06,82.169 99.6,74.709 99.6,43.148 104.448,38.3 v4(129.1,38.3)
VCC_k: PWR.1 R7.2 | length 22.4
  Top Layer w0.381: R7.2@147.881,63.246 147.881,59.419 151.42,55.88 158.505,55.88 PWR.1@163.068,51.317
VCC_rect: K1.3 PWR.3 | length 60.6
  Bottom Layer w0.762: K1.3@106.933,48.133 106.933,44.959 111.935,39.957 146.208,39.957 PWR.3@157.568,51.317
X1: C7.2 MCU1.8 XTAL1.1 | length 8.3
  Top Layer w0.381: XTAL1.1@127.007,73.919 127.007,74.019 129.366,76.378 MCU1.8@131.293,76.378
  Top Layer w0.762: C7.2@125.541,71.628 125.614,71.628 126.884,72.898 126.884,73.796 XTAL1.1@127.007,73.919
X2: C8.2 MCU1.7 XTAL1.3 | length 9.5
  Top Layer w0.381: XTAL1.3@124.707,77.719 124.707,77.619 125.75,76.576 127.941,76.576 128.555,77.191 MCU1.7@131.293,77.191
  Top Layer w0.762: C8.2@122.555,77.662 122.583,77.69 124.678,77.69 XTAL1.3@124.707,77.719
pads on no net: I/O.20 I/O.MH1 I/O.MH2 ISP1.2 ISP1.3 ISP1.4 ISP1.6 K3.4 K4.4 MCU1.30 MCU1.31 MCU1.32 MCU1.33 MCU1.34 MCU1.35 MCU1.40 MCU1.41 RST1.3

## Polygon pours and split planes (outlines as drawn)
GND on Top Layer "GND_L01_P003" (solid, pour order 3): 84,114.5 84,32.5 178,32.5 178,114.5
V_reg on Top Layer "V_REG_L01_P002" (solid, pour order 2): 136.652,55.626 124.333,55.626 124.333,57.658 124.46,57.785 136.215,57.785 136.652,57.348
NetC1_2 on Top Layer "NETC1_2_L01_P000" (solid, pour order 0): 134.366,49.276 126.746,49.276 126.746,51.237 126.716,51.267 126.757,51.308 131.191,51.308 132.461,50.038 134.366,50.038
GND on Bottom Layer "GND_L02_P007" (solid, pour order 7): 84,114.5 177.927,114.5 177.927,32.5 84,32.5

## Other copper
Top Layer:
  pour cut-out: 131.699,55.626 124.333,55.626 124.333,51.267 131.531,51.267 131.704,51.44
  pour cut-out: 131.704,55.626 124.333,55.626 124.333,51.435 131.699,51.435 131.704,51.44

## Silkscreen, mask and mechanical layers (free items; w line width, h text height)
Top Overlay:
  lines w0.154: 118.3,84.8 121,84.8 121.8,85.6 ; 121.8,85.6 127.3,85.6 127.3,88.9 121.8,88.9 121.8,85.6 ; 121.8,85.6 121.8,85.6
  lines w0.254: 149.6,47.2 154.6,47.2 ; 152.1,44.5 152.1,49.6 ; 121.8,85.6 121.8,85.6 ; 149.5,44.5 154.7,44.5 154.7,49.7 149.5,49.7 149.5,44.5
  text "reset" at 118.433,85.215 h0.52
  text "V_rect" at 150,48.25 h0.3
  text "V_key" at 152.739,48.246 h0.3
  text "GND" at 150.4,45.6 h0.3
  text "V_bat" at 152.748,45.573 h0.3
Bottom Overlay:
  text "PCrs v2.0" at 168.791,38.3 h2
  text "by Maksymilian Mazur" at 168.791,35.1 h1.5

## Text inside footprints (layer, text, board x,y; h text height)
MCU1: Top Overlay "*" at 130.683,83.312 h1.27; Mechanical 13 "*" at 129.337,82.118 h1.27